# EAGLE board RC Car (EAGLE 9.7.0)

Size 282.81 x 401.67 mm. Coordinates in mm from the lower left corner, seen from the top.
Outline: 0,0 282.81,0 282.81,401.68 0,401.68 0,0
Copper layers (1*16): Top 0.035mm / dielectric 1.5mm / Bottom 0.035mm
Design rules "default": minimum track width 6mil, minimum drill 0.35mm, track to track 6mil, track to pad 6mil, pad to pad 6mil, via to via 6mil, smd to smd 6mil, copper to edge 40mil, drill to drill 6mil, minimum pad ring 10mil, minimum via ring 8mil, stop-mask expansion 4mil, vias tented up to drill 0mil, thermal gap 10mil

## Footprints (pad centres in the part's own frame; a part is rotated, then mirrored left to right if it is on the bottom)
BATTERY-GENERIC = drill 1.118 pad 3.15 octagon: + 2.54,0; - -2.54,0
LEDRD254W60D565H860B_W = drill 0.981 pad 1.581: 1 -1.27,0; 2 1.27,0
DG01D = drill 1.118 pad 3.15 octagon: + 2.54,0; - -2.54,0
PIEZO = drill 1 pad 1.6: 1 -3.5,0; 2 3.5,0
RESAD1016W63L850D250B = drill 0.83 pad 1.43: 1 -5.08,0; 2 5.08,0
HA-06-SM065 = drill 1 pad 1.676: 1 -2.54,-2.54; 2 0,2.54; 3 2.54,-2.54
ARDUINO-UNO-R3-SHIELD = drill 1.016 pad 1.88: 3.3V 24.13,-2.54; 5V 24.13,0; A0 24.13,12.7; A1 24.13,15.24; A2 24.13,17.78; A3 24.13,20.32; A4 24.13,22.86; A5 24.13,25.4; AREF -24.13,-13.97; D2 -24.13,20.32; D3 -24.13,17.78; D4 -24.13,15.24; D5 -24.13,12.7; D6 -24.13,10.16; D7 -24.13,7.62; D8 -24.13,3.81; D9 -24.13,1.27; D10 -24.13,-1.27; D11 -24.13,-3.81; D12 -24.13,-6.35; D13 -24.13,-8.89; GND@0 24.13,2.54; GND@1 24.13,5.08; GND@2 -24.13,-11.43; IOREF 24.13,-7.62; NC 24.13,-10.16; RES 24.13,-5.08; RX -24.13,25.4; SCL -24.13,-19.05; SDA -24.13,-16.51; TX -24.13,22.86; VIN 24.13,7.62
DIP762W53P254L1969H508Q16B = drill 0.743 pad 1.343: 1 -3.81,8.89; 2 -3.81,6.35; 3 -3.81,3.81; 4 -3.81,1.27; 5 -3.81,-1.27; 6 -3.81,-3.81; 7 -3.81,-6.35; 8 -3.81,-8.89; 9 3.81,-8.89; 10 3.81,-6.35; 11 3.81,-3.81; 12 3.81,-1.27; 13 3.81,1.27; 14 3.81,3.81; 15 3.81,6.35; 16 3.81,8.89
TO220V = drill 1.016 long: 1 -2.54,-2.54; 2 0,-2.54; 3 2.54,-2.54

## Placement (x,y rotation side)
BAT1  6V  [BATTERY-GENERIC]  8.26,240.32 270 top
BAT2  6V  [BATTERY-GENERIC]  259.71,240.32 90 top
BAT4  9V  [BATTERY-GENERIC]  253.13,8.26 270 top
D1  WHITE  [LEDRD254W60D565H860B_W]  144.24,224.43 180 top
D2  WHITE  [LEDRD254W60D565H860B_W]  156.94,224.43 180 top
M1  MOTOR_DG01D  [DG01D]  102.34,292.45 270 top
M2  MOTOR_DG01D  [DG01D]  173.72,310.49 90 top
M3  MOTOR_DG01D  [DG01D]  102.34,371.19 270 top
M4  MOTOR_DG01D  [DG01D]  173.46,388.98 90 top
PIEZO2  PIEZO  [PIEZO]  210.99,68.76 0 top
PIEZO3  PIEZO  [PIEZO]  241.47,68.76 0 top
R1  1k  [RESAD1016W63L850D250B]  142.97,216.81 90 top
R2  1k  [RESAD1016W63L850D250B]  155.67,216.81 90 top
RPOT1  250k  [HA-06-SM065]  275.76,68.76 180 top
U1  ARDUINO-UNO-R3-SHIELD  [ARDUINO-UNO-R3-SHIELD]  67.79,162.76 270 top
U2  L293E  [DIP762W53P254L1969H508Q16B]  108.68,233.32 90 top
U4  ARDUINO-UNO-R3-SHIELD  [ARDUINO-UNO-R3-SHIELD]  67.79,63.7 270 top
U5  LM7805_TO220V  [TO220V]  230.04,53.52 0 top

## Library data of the parts
BAT1 BAT2 BAT4 M1-M4 PIEZO2 PIEZO3 R1 R2 RPOT1 U1 U2 U4 U5 = Tinkercad
D1 D2 = Tinkercad; CATEGORY: Opto-Electronic; SUB-CATEGORY: LED; VALUE: LED_WHITE

## Nets
BAT1+: BAT1.+ BAT2.+
BAT1-: BAT1.- BAT2.- BAT4.- R1.1 R2.1 RPOT1.3 U1.GND@0 U1.GND@1 U1.GND@2 U2.4 U2.5 U2.12 U2.13 U4.GND@0 U4.GND@1 U4.GND@2 U5.2
BAT4+: BAT4.+ U5.1
D1_C: D1.2 R1.2
D2_C: D2.2 R2.2
M1_+: M1.+ M2.+ U2.3
M1_-: M1.- M2.- U2.6
M3_+: M3.+ M4.+ U2.11
M3_-: M3.- M4.- U2.14
PIEZO3_2: PIEZO2.2 PIEZO3.2 RPOT1.2
U1_5V: U1.5V U2.16
U1_D2: U1.D2 U4.D10
U1_D4: U1.D4 U2.2
U1_D5: U1.D5 U2.7
U1_D6: U1.D6 U2.10
U1_D7: U1.D7 U2.15
U1_D9: U1.D9 U2.1
U1_D10: U1.D10 U2.9
U1_D12: D1.1 U1.D12
U1_D13: D2.1 U1.D13
U4_VIN: PIEZO2.1 PIEZO3.1 RPOT1.1 U4.VIN U5.3

## Tracks (layer width: path | path; a pad name or v marks a point on that pad's centre or on a via)
BAT1+  (1 unrouted)
BAT1-  (16 unrouted)
BAT4+  (1 unrouted)
D1_C  (1 unrouted)
D2_C  (1 unrouted)
M1_+  (2 unrouted)
M1_-  (2 unrouted)
M3_+  (2 unrouted)
M3_-  (2 unrouted)
PIEZO3_2  (2 unrouted)
U1_5V  (1 unrouted)
U1_D2  (1 unrouted)
U1_D4  (1 unrouted)
U1_D5  (1 unrouted)
U1_D6  (1 unrouted)
U1_D7  (1 unrouted)
U1_D9  (1 unrouted)
U1_D10  (1 unrouted)
U1_D12  (1 unrouted)
U1_D13  (1 unrouted)
U4_VIN  (4 unrouted)